# EAGLE board ACS713-SOIC8 (EAGLE 8.1.1)
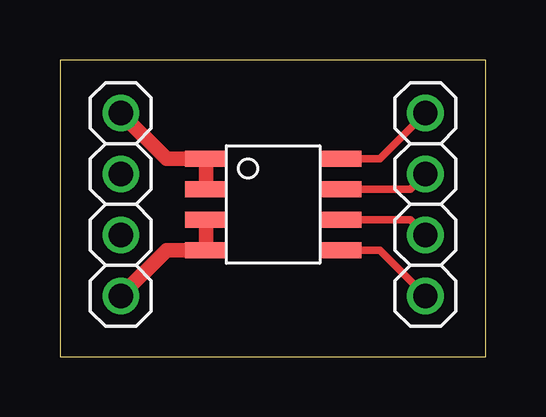
[diagram p0: board, top side]

Size 17.76 x 12.37 mm. Coordinates in mm from the lower left corner, seen from the top.
Outline: 0,0 17.76,0 17.76,12.37 0,12.37 0,0
Copper layers (1*16): Top 0.035mm / dielectric 1.5mm / Bottom 0.035mm
Design rules "default": minimum track width 10mil, minimum drill 24mil, track to track 8mil, track to pad 8mil, pad to pad 8mil, via to via 8mil, smd to smd 8mil, copper to edge 40mil, drill to drill 8mil, minimum pad ring 10mil, minimum via ring 8mil, stop-mask expansion 4mil, vias tented up to drill 0mil, thermal gap 10mil

## Footprints (pad centres in the part's own frame; a part is rotated, then mirrored left to right if it is on the bottom)
1X04 = drill 1.016: 1 -3.81,0; 2 -1.27,0; 3 1.27,0; 4 3.81,0
ACS713-SOIC = smd 0.65 x 1.75: P$1 -1.905,-2.8; P$2 -0.635,-2.8; P$3 0.635,-2.8; P$4 1.905,-2.8; P$5 1.905,2.8; P$6 0.635,2.8; P$7 -0.635,2.8; P$8 -1.905,2.8

## Placement (x,y rotation side)
JP1  [1X04]  15.24,6.35 270 top
JP2  [1X04]  2.54,6.35 270 top
U$1  ACS713SOIC  [ACS713-SOIC]  8.89,6.35 270 top

## Library data of the parts
JP1 JP2 = pinhead
U$1 = allegro

## Nets
N$1: JP2.1 U$1.P$1 U$1.P$2
N$2: JP2.4 U$1.P$3 U$1.P$4
N$3: JP1.4 U$1.P$5
N$4: JP1.3 U$1.P$6
N$5: JP1.2 U$1.P$7
N$6: JP1.1 U$1.P$8

## Tracks (layer width: path | path; a pad name or v marks a point on that pad's centre or on a via)
N$1
  Top 0.61: U$1.P$2 U$1.P$1 4.45,8.26 JP2.1
N$2
  Top 0.61: U$1.P$3 U$1.P$4 4.45,4.45 JP2.4
N$3
  Top 0.305: U$1.P$5 13.34,4.45 JP1.4
N$4
  Top 0.305: U$1.P$6 14.61,5.71 JP1.3
N$5
  Top 0.305: U$1.P$7 14.61,6.99 JP1.2
N$6
  Top 0.305: U$1.P$8 13.34,8.26 JP1.1